# EAGLE board Y-babies ATtiny84-- PRINT VER (EAGLE 6.4)
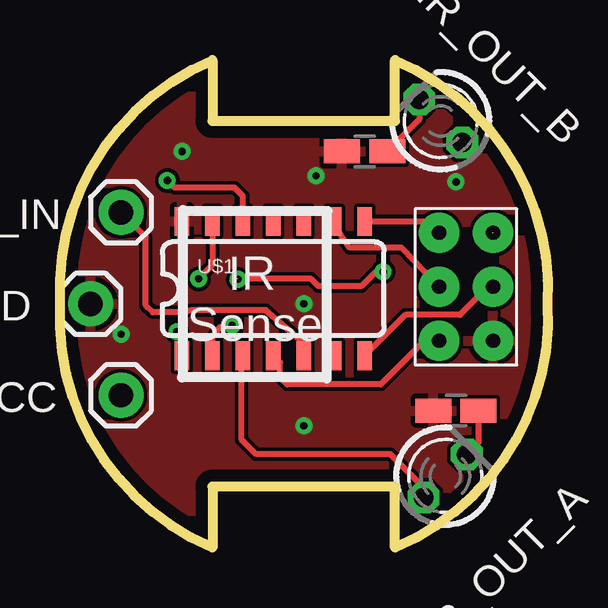
[diagram p0: board, top side]
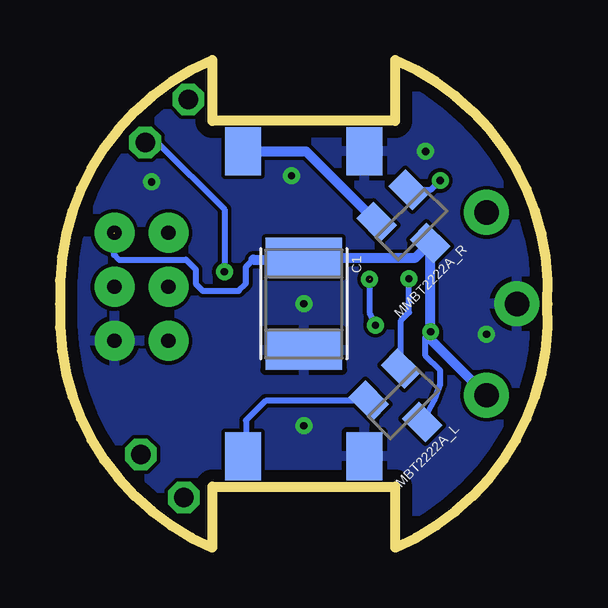
[diagram p1: board, bottom side, seen from below]

Size 20.34 x 20.32 mm. Coordinates in mm from the lower left corner, seen from the top.
Outline: 20.33,10.16 arc-70 13.98,0 13.98,2.54 6.36,2.54 6.36,0 arc-70 0.01,10.16 arc-70 6.36,20.32 6.36,17.78 13.98,17.78 13.98,20.32 arc-70 20.33,10.16
Copper layers (1*16): Top 0.035mm / dielectric 1.5mm / Bottom 0.035mm
Design rules "default *": minimum track width 10mil, minimum drill 24mil, track to track 6mil, track to pad 6mil, pad to pad 6mil, via to via 6mil, smd to smd 6mil, copper to edge 20mil, drill to drill 8mil, minimum pad ring 10mil, minimum via ring 8mil, stop-mask expansion 4mil, vias tented up to drill 0mil, thermal gap 8mil

## Footprints (pad centres in the part's own frame; a part is rotated, then mirrored left to right if it is on the bottom)
GRM43D = smd 1.65 x 3.2: A 1.927,0; C -1.927,0
1X01 = drill 1.016 pad 1.88: 1 0,0
LED3MM = drill 0.813 octagon: A -1.27,0; K 1.27,0
SOT23 = smd 1 x 1.4: 1 -0.95,-1.1; 2 0.95,-1.1; 3 0,1.1
PAD-1.5X4.5 = smd 1.5 x 2: P$1 0,0
R0805W = smd 1.5 x 1: 1 -0.94,0; 2 0.94,0
SO14 = smd 0.6 x 1.2: 1 -3.81,-2.8; 2 -2.54,-2.8; 3 -1.27,-2.8; 4 0,-2.8; 5 1.27,-2.8; 6 2.54,-2.8; 7 3.81,-2.8; 8 3.81,2.8; 9 2.54,2.8; 10 1.27,2.8; 11 0,2.8; 12 -1.27,2.8; 13 -2.54,2.8; 14 -3.81,2.8
POGO_PIN_SPI_PAD = drill 0.6 pad 1.676: GND 1,-1; MISO 3.25,-5.5; MOSI 1,-3.25; RST 3.25,-1; SCK 3.25,-3.25; VCC 1,-5.5

## Placement (x,y rotation side)
C1  [GRM43D]  10.17,10.16 270 bottom
GND  M01PTH  [1X01]  1.28,10.16 0 top
IR_OUT_A  [LED3MM]  16.07,2.99 45 top
IR_OUT_B  [LED3MM]  15.88,17.78 135 top
MMBT2222A_L  [SOT23]  6.01,6.01 225 bottom
MMBT2222A_R  [SOT23]  5.68,13.47 225 bottom
MOT_1_A  M01SMD-4.5X1.5  [PAD-1.5X4.5]  7.63,16.51 0 bottom
MOT_1_B  M01SMD-4.5X1.5  [PAD-1.5X4.5]  12.71,3.81 0 bottom
MOT_2_A  M01SMD-4.5X1.5  [PAD-1.5X4.5]  12.71,16.51 0 bottom
MOT_2_B  M01SMD-4.5X1.5  [PAD-1.5X4.5]  7.63,3.81 0 bottom
R1  [R0805W]  16.52,5.71 180 top
R2  [R0805W]  12.71,16.51 180 top
SER_IN  M01PTH  [1X01]  2.55,13.97 0 top
U$1  ATTINY84  [SO14]  8.9,10.79 0 top
U$2  POGO_PIN_SPI_PAD  [POGO_PIN_SPI_PAD]  19.06,7.62 180 top
VCC  M01PTH  [1X01]  2.55,6.35 0 top

## Library data of the parts
C1 GND MMBT2222A_L MMBT2222A_R MOT_1_A MOT_1_B MOT_2_A MOT_2_B SER_IN VCC = SparkFun
IR_OUT_A IR_OUT_B = led
R1 R2 = resistor
U$1 = SparkFun-DigitalIC
U$2 = Random parts

## Nets
GND: C1.A GND.1 MOT_1_A.P$1 MOT_2_B.P$1 R1.2 R2.2 U$1.14 U$2.GND
N$3: IR_OUT_B.A U$1.2
N$4: IR_OUT_B.K R2.1
N$5: U$1.4 U$2.RST
N$6: IR_OUT_A.A U$1.3
N$7: IR_OUT_A.K R1.1
N$8: SER_IN.1 U$1.5
N$9: MMBT2222A_L.2 MOT_1_B.P$1
N$10: MMBT2222A_R.2 MOT_2_A.P$1
N$11: U$1.9 U$2.SCK
N$12: U$1.8 U$2.MISO
N$13: U$1.7 U$2.MOSI
N$14: MMBT2222A_L.1 U$1.13
N$15: MMBT2222A_R.1 U$1.12
VCC: C1.C MMBT2222A_L.3 MMBT2222A_R.3 U$1.1 U$2.VCC VCC.1

## Tracks (layer width: path | path; a pad name or v marks a point on that pad's centre or on a via)
GND  (via drill 0.3)
  other vias: 10.17,10.16 10.17,5.08 2.55,8.89 5.09,16.51 16.52,15.24 10.68,15.5
  pour Bottom: -1.26,22.86 -1.26,0 21.6,0 21.6,22.86
  pour Top: -1.26,22.86 -1.26,0 21.6,0 21.6,22.86
N$3  (via drill 0.3)  (1 unrouted)
  Top 0.254: U$1.2 6.36,8.78 6.68,9.2 7.11,9.2 v7.18,9.27 | v13.48,11.5 13.18,11.5 12.58,10.9 10.78,10.9 10.48,11.2 7.38,11.2
  Bottom 0.254: IR_OUT_B.A 16.26,16.88 13.48,14.1 v13.48,11.5 | v7.43,11.18 7.43,9.82 v7.18,9.27
N$4
  Top 0.254: IR_OUT_B.K 14.98,17.85 R2.1
N$5
  Top 0.254: U$2.RST 15.2,8.62 13.38,6.8 9.48,6.8 9.18,7.1 9.18,7.71 U$1.4
N$6
  Top 0.254: IR_OUT_A.A 15.17,2.51 13.78,3.9 8.18,3.9 7.58,4.5 7.58,7.95 U$1.3
N$7
  Top 0.254: R1.1 17.46,4.38 IR_OUT_A.K
N$8
  Top 0.254: U$1.5 10.17,8.51 8.58,9.9 5.48,9.9 5.18,9.8 3.88,9.8 3.58,10.1 3.58,12.94 SER_IN.1
N$9
  Bottom 0.254: MMBT2222A_L.2 11.76,6.12 12.58,5.3 12.58,3.94 MOT_1_B.P$1
N$10
  Bottom 0.406: MOT_2_A.P$1 10.07,16.51 MMBT2222A_R.2
N$11
  Top 0.254: U$2.SCK 14.24,12.5 12.08,12.5 11.38,13.54 U$1.9
N$12
  Top 0.254: U$1.8 15.33,13.6 U$2.MISO
N$13
  Top 0.254: U$2.MOSI 17.85,10.87 16.68,9.7 14.41,9.7 U$1.7
N$14  (via drill 0.3)
  Top 0.254: U$1.13 6.36,11.78 v5.78,11.2
  Bottom 0.254: MMBT2222A_L.1 6.11,9.47 5.78,9.8 v5.78,11.2
N$15  (via drill 0.3)
  Top 0.254: U$1.12 7.63,14.65 7.28,15 4.78,15 v4.48,15.3
  Bottom 0.254: MMBT2222A_R.1 4.86,14.92 v4.48,15.3
VCC  (via drill 0.3)  (1 unrouted)
  Top 0.254: U$1.1 5.09,8.99 | 5.09,8.99 v4.88,9 | 5.09,8.99 5,8.99 4.9,8.89
  Bottom 0.254: 18.08,13.1 18.08,12.2 17.88,12 15.08,12 14.68,11.6 14.68,11 14.38,10.7 12.88,10.7 12.58,11 12.58,11.7 12.28,12 | 4.9,8.71 4.9,8.82 v4.88,9 5.09,8.79 U$1.1 4.48,7.38 4.48,6.8 4.73,6.15 MMBT2222A_L.3
  Bottom 0.406: VCC.1 4.9,8.71 MMBT2222A_R.3 5.51,12.09 C1.C 10.25,12 12.28,12

## Text on the board
_tsilk: IR / Sense